# EAGLE board SCFschem (EAGLE 8.3.1)
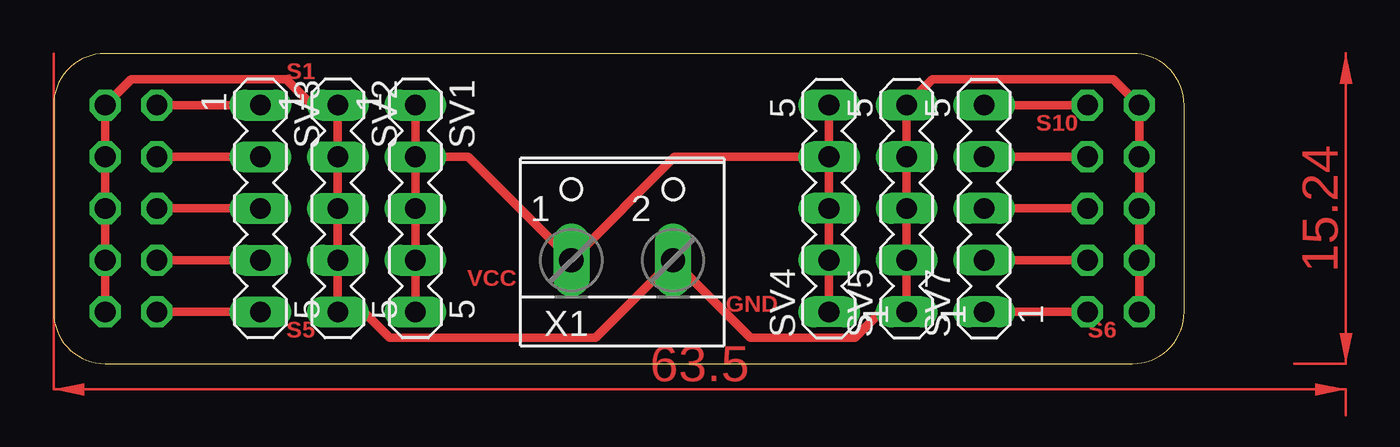
[diagram p0: board, top side]
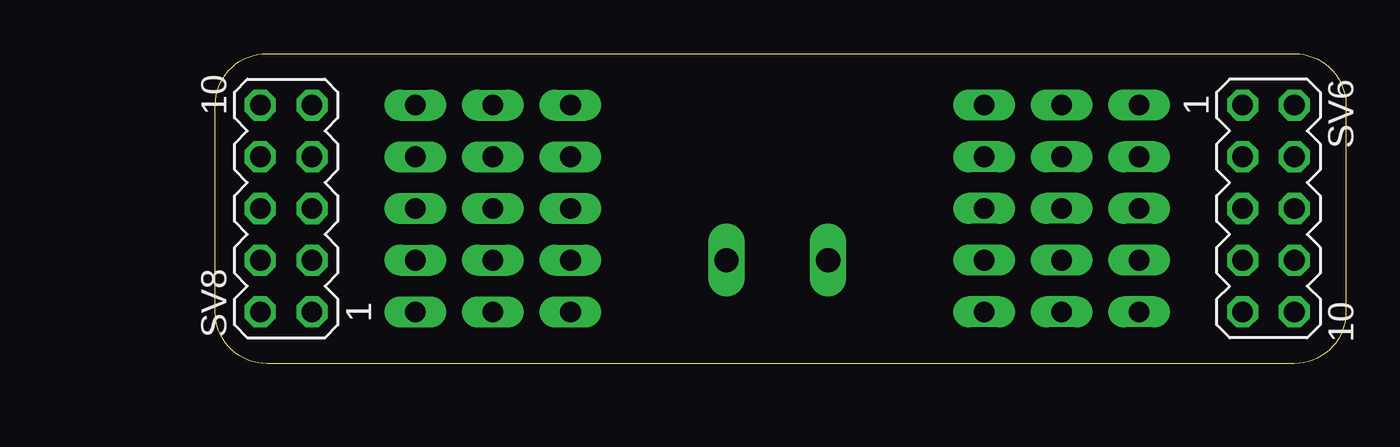
[diagram p1: board, bottom side, seen from below]

Size 55.55 x 15.23 mm. Coordinates in mm from the lower left corner, seen from the top.
Outline: 0,12.69 0,2.54 arc90 2.54,0 53.01,0 arc90 55.55,2.54 55.55,12.69 arc90 53.01,15.23 2.54,15.23 arc90 0,12.69
Copper layers (1*16): Top 0.035mm / dielectric 1.5mm / Bottom 0.035mm
Design rules "Dirty8TS": minimum track width 8mil, minimum drill 15mil, track to track 8mil, track to pad 8mil, pad to pad 8mil, via to via 8mil, smd to smd 0mil, copper to edge 10mil, drill to drill 10mil, minimum pad ring 10mil, minimum via ring 6mil, stop-mask expansion 2mil, vias tented up to drill 25mil, thermal gap 10mil

## Footprints (pad centres in the part's own frame; a part is rotated, then mirrored left to right if it is on the bottom)
MA05-1 = drill 1.016 long: 1 -5.08,0; 2 -2.54,0; 3 0,0; 4 2.54,0; 5 5.08,0
MA05-2 = drill 1.016 octagon: 1 -5.08,-1.27; 2 -5.08,1.27; 3 -2.54,-1.27; 4 -2.54,1.27; 5 0,-1.27; 6 0,1.27; 7 2.54,-1.27; 8 2.54,1.27; 9 5.08,-1.27; 10 5.08,1.27
W237-102 = drill 1.194 long: 1 -2.5,-1.27; 2 2.5,-1.27

## Placement (x,y rotation side)
SV1  [MA05-1]  17.78,7.62 270 top
SV2  [MA05-1]  13.97,7.62 270 top
SV3  [MA05-1]  10.16,7.62 270 top
SV4  [MA05-1]  38.1,7.62 90 top
SV5  [MA05-1]  41.91,7.62 90 top
SV6  [MA05-2]  3.81,7.62 270 bottom
SV7  [MA05-1]  45.72,7.62 90 top
SV8  [MA05-2]  52.07,7.62 90 bottom
X1  [W237-102]  27.94,6.35 0 top

## Library data of the parts
SV1-SV8 = con-lstb; OC_FARNELL: unknown; OC_NEWARK: unknown
X1 = ECE388; MPN: 237-102; OC_FARNELL: unknown; OC_NEWARK: 70K9898

## Nets
GND: SV2.1 SV2.2 SV2.3 SV2.4 SV2.5 SV5.1 SV5.2 SV5.3 SV5.4 SV5.5 SV6.2 SV6.4 SV6.6 SV6.8 SV6.10 SV8.2 SV8.4 SV8.6 SV8.8 SV8.10 X1.2
S1: SV3.1 SV6.1
S2: SV3.2 SV6.3
S3: SV3.3 SV6.5
S4: SV3.4 SV6.7
S5: SV3.5 SV6.9
S6: SV7.1 SV8.1
S7: SV7.2 SV8.3
S8: SV7.3 SV8.5
S9: SV7.4 SV8.7
S10: SV7.5 SV8.9
VCC: SV1.1 SV1.2 SV1.3 SV1.4 SV1.5 SV4.1 SV4.2 SV4.3 SV4.4 SV4.5 X1.1

## Tracks (layer width: path | path; a pad name or v marks a point on that pad's centre or on a via)
GND
  Top 0.406: 13.97,2.67 SV2.4 SV2.3 13.97,7.65 SV2.2 SV2.1 12.7,12.7 11.43,13.97 3.81,13.97 SV6.2 SV6.4 SV6.6 SV6.8 SV6.10 | 13.97,2.67 SV2.5 | 41.91,2.61 SV5.1 | 41.91,2.61 SV5.2 SV5.3 SV5.4 SV5.5 43.18,13.97 52.07,13.97 SV8.10 53.34,12.58 SV8.8 SV8.6 SV8.4 SV8.2 | 13.97,2.67 15.12,2.67 16.51,1.27 26.63,1.27 X1.2 34.25,1.27 39.37,1.27 40.71,2.61 41.91,2.61
S1
  Top 0.406: SV6.1 SV3.1
S2
  Top 0.406: SV3.2 SV6.3
S3
  Top 0.406: SV3.3 SV6.5
S4
  Top 0.406: SV3.4 SV6.7
S5
  Top 0.406: SV3.5 SV6.9
S6
  Top 0.406: SV7.1 SV8.1
S7
  Top 0.406: SV7.2 SV8.3
S8
  Top 0.406: SV7.3 SV8.5
S9
  Top 0.406: SV7.4 SV8.7
S10
  Top 0.406: SV7.5 SV8.9
VCC
  Top 0.406: SV1.2 SV1.1 | SV1.2 SV1.3 SV1.4 SV1.5 | SV4.4 SV4.5 | SV4.4 SV4.3 SV4.2 SV4.1 | SV1.2 20.36,10.16 X1.1 30.52,10.16 SV4.4
(copper drawn outside any net)
  shapes: Top area x2

## Text on the board
Top: S1 | S10 | VCC | GND | S5 | S6